# Altium PCB ssop28 - single.PcbDoc
Units mil, origin at the board's own origin, x right, y up, seen from the top; angles counter-clockwise.
Board outline 1487 x 879.22 mil, 2 copper layers (Top Layer, Bottom Layer); 3 components, 142 nets, 56 pads, 0 vias.
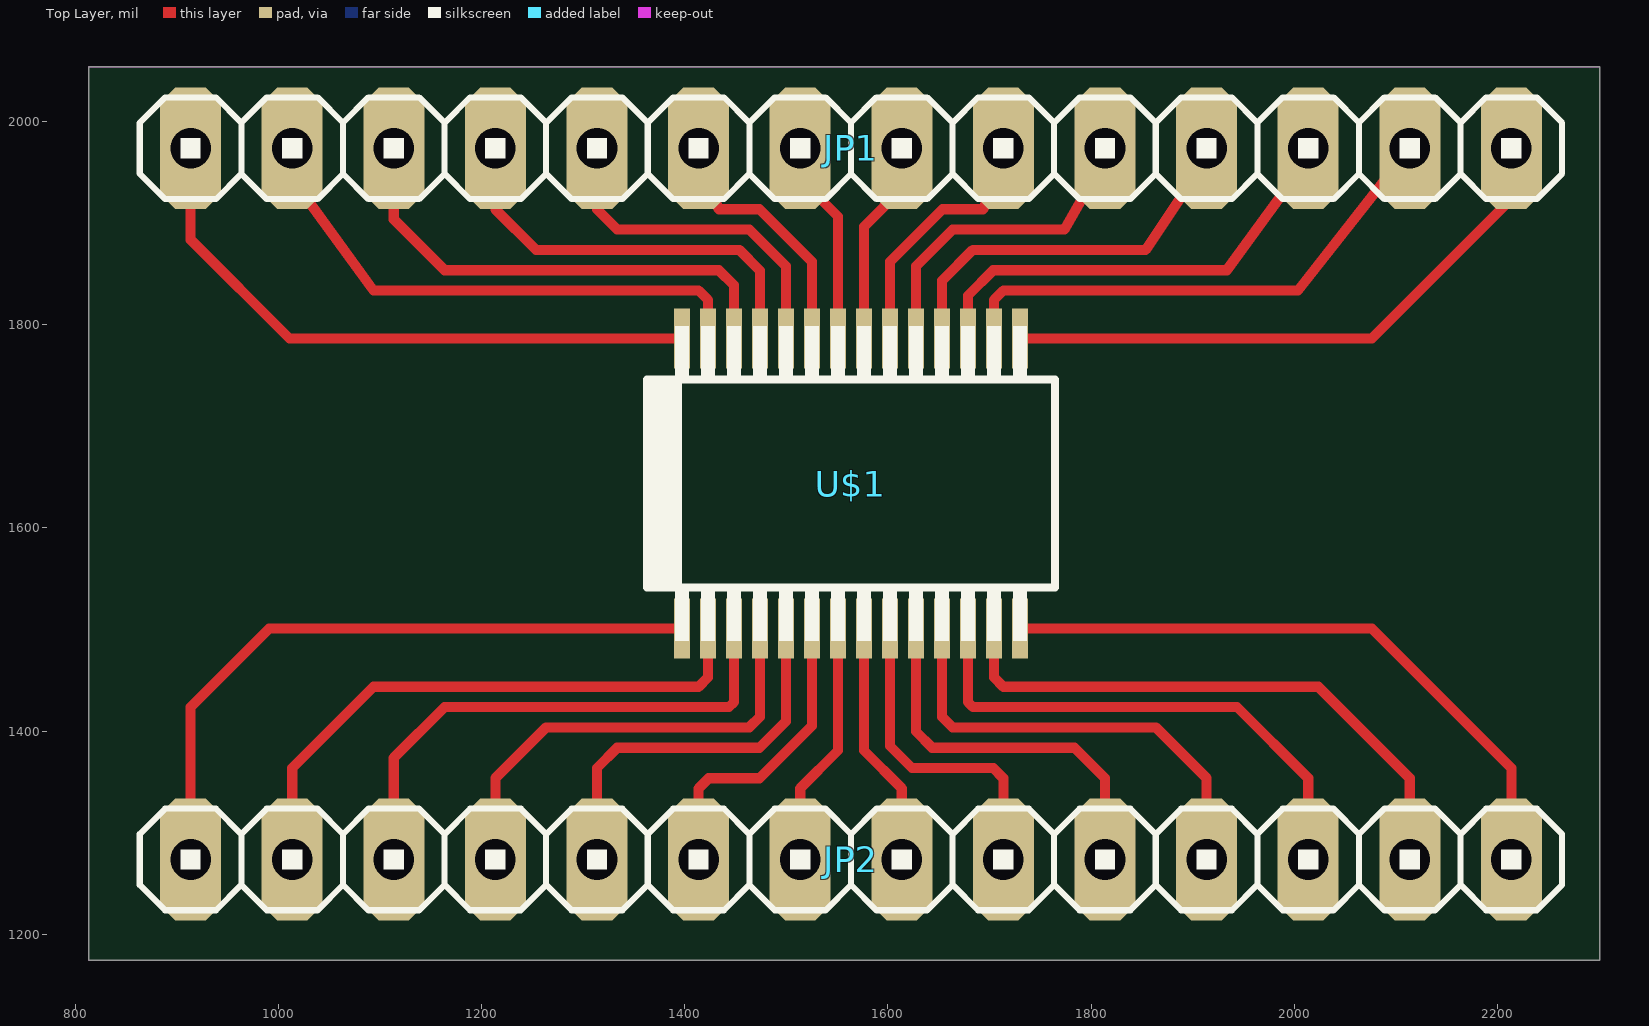
[diagram p0: Top Layer view]
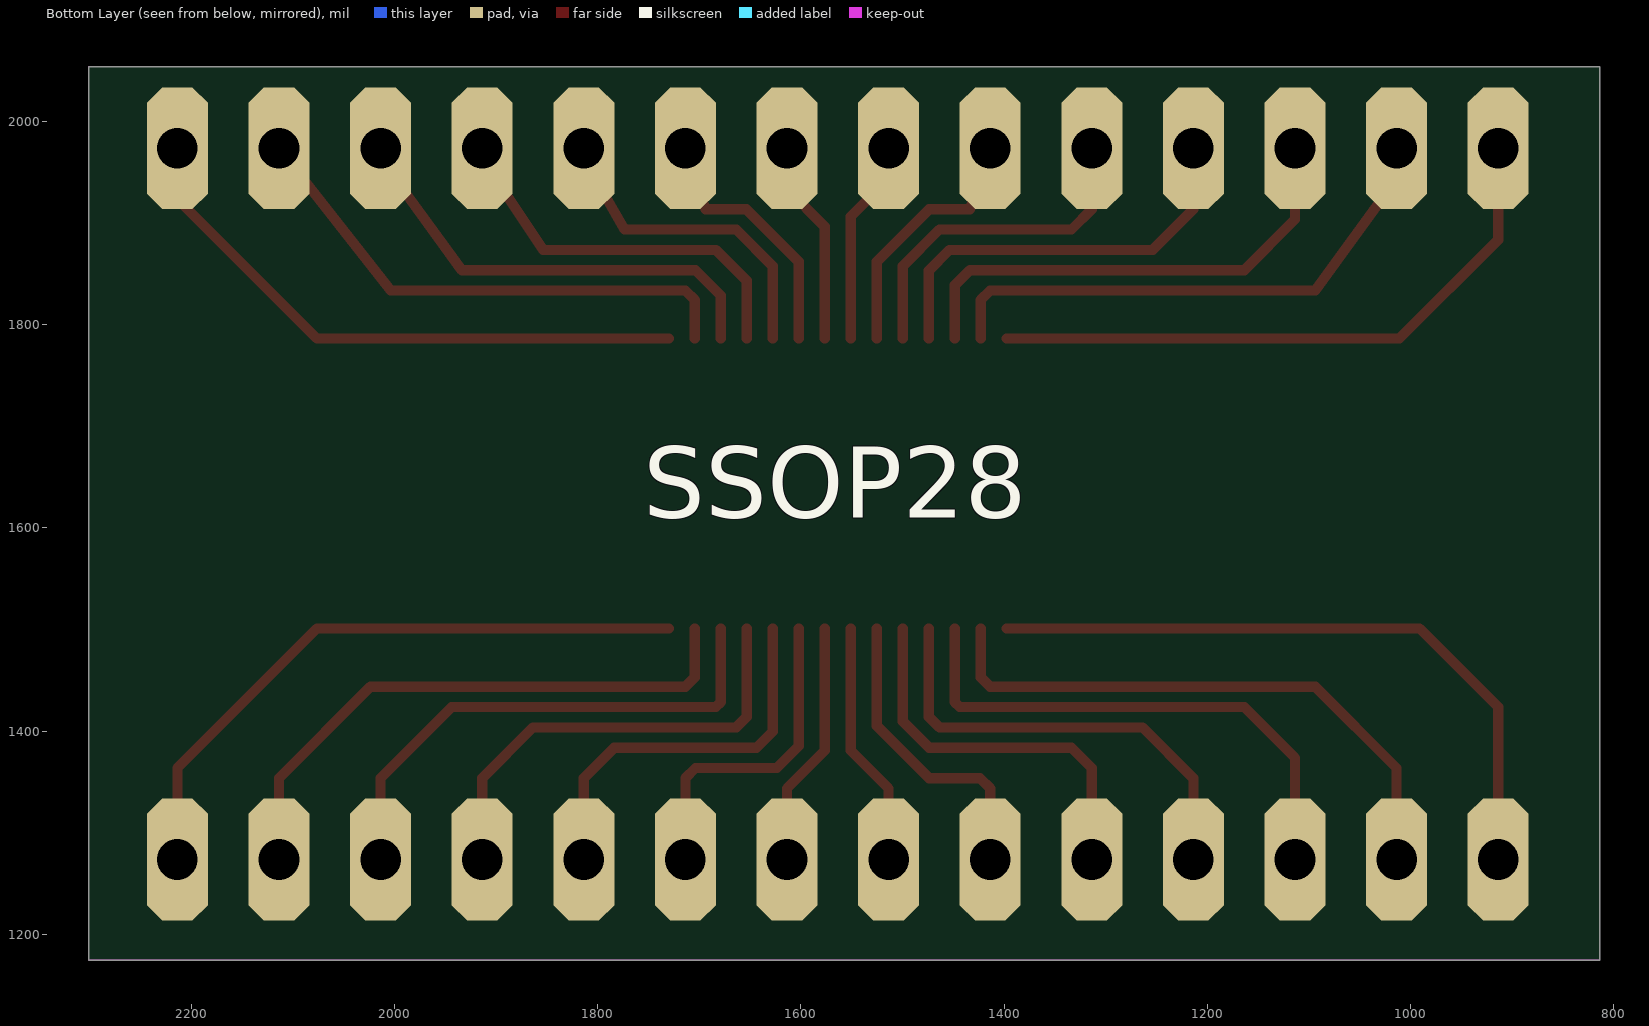
[diagram p1: Bottom Layer view, seen from below]

## Layer stack, top to bottom
Top Layer: signal copper 1.4
Dielectric: dielectric 12.6, FR-4, Dk 4.8
Bottom Layer: signal copper 1.4

## Board outline
813.67,1174.45 813.67,2053.67 2300.67,2053.67 2300.67,1174.45

## Design rules (kind name [scope] priority, off if disabled: settings)
Clearance [All] p1: gap=10
PolygonConnect [All] p1: connectstyle=Relief reliefconductorwidth=10 reliefentries=4 polygonreliefangle="90 Angle"
RoutingVias [All] p1: holewidth=28 width=50 viastyle="Through Hole" minholewidth=28 minwidth=50 maxholewidth=28 maxwidth=50
SilkscreenOverComponentPads [All] p1: minsilkscreentomaskgap=10
SolderMaskExpansion [All] p1: expansion=4
Width [All] p1: maxlimit=10 minlimit=10 preferedwidth=10
27 further rules are at their usual default settings.

## Components (designator, comment, footprint, x,y, rotation, side; value= is the part's Value field where it differs from the comment)
JP1 "Comment" 1X14 1563.67,1973.67 r180 top
JP2 "Comment" 1X14 1563.67,1273.67 r0 top
U$1 "PIC18F26K20-SSOP" SSOP28 1563.67,1643.67 r0 top

## Footprints (in the part's own frame and the unit in brackets; to place one, negate y for a bottom-side part, rotate by r counter-clockwise, add the part's x,y. Pads: shape width x height; smd on the part's side, far side on the other; paste and mask are expansions set on the pad)
1X14 [mil]
  oct 60x120 hole 40: 1(-650,0) 2(-550,0) 3(-450,0) 4(-350,0) 5(-250,0) 6(-150,0) 7(-50,0) 8(50,0) 9(150,0) 10(250,0) 11(350,0) 12(450,0) 13(550,0) 14(650,0)
  silkscreen extent -700,-50 700,50
SSOP28 [mm]
  rect 0.4x1.5 smd: 1(-4.225,-3.625) 2(-3.575,-3.625) 3(-2.925,-3.625) 4(-2.275,-3.625) 5(-1.625,-3.625) 6(-0.975,-3.625) 7(-0.325,-3.625) 8(0.325,-3.625) 9(0.975,-3.625) 10(1.625,-3.625) 11(2.275,-3.625) 12(2.925,-3.625) 13(3.575,-3.625) 14(4.225,-3.625) 15(4.225,3.625) 16(3.575,3.625) 17(2.925,3.625) 18(2.275,3.625) 19(1.625,3.625) 20(0.975,3.625) 21(0.325,3.625) 22(-0.325,3.625) 23(-0.975,3.625) 24(-1.625,3.625) 25(-2.275,3.625) 26(-2.925,3.625) 27(-3.575,3.625) 28(-4.225,3.625)
  silkscreen extent -5.2,-3.94 5.1,3.94

## Nets (pads, with @x,y where several pads share a name; then routed paths per layer and width w, separated by ;. In a path a pad name is that pad's centre, name@x,y a point inside that pad or via, vN(x,y) a via of type N, cw(c..) or ccw(c..) an arc to the next point about the centre after c; other vN are vias at no path point)
N$1: JP2.11 U$1.11 | length 452.3
  Top Layer w10: U$1.11 1653.23,1414.1 1663.67,1403.67 1863.67,1403.67 1913.67,1353.67 JP2.11
N$2: JP2.8 U$1.8 | length 242.7
  Top Layer w10: U$1.8 1576.46,1380.87 1613.67,1343.67 JP2.8
N$3: JP2.9 U$1.9 | length 320.4
  Top Layer w10: U$1.9 1602.05,1385.28 1623.67,1363.67 1703.67,1363.67 1713.67,1353.67 JP2.9
N$4: JP2.10 U$1.10 | length 386.3
  Top Layer w10: U$1.10 1627.64,1399.69 1643.67,1383.67 1783.67,1383.67 1813.67,1353.67 JP2.10
N$5: JP1.7 U$1.21 | length 202.7
  Top Layer w10: U$1.21 1576.46,1896.46 1613.67,1933.67 JP1.7
N$6: JP1.8 U$1.22 | length 202.7
  Top Layer w10: JP1.8 1513.67,1943.67 1550.87,1906.46 U$1.22
N$7: JP1.9 U$1.23 | length 252.5
  Top Layer w10: JP1.9 1413.67,1963.67 1433.67,1913.67 1473.67,1913.67 1525.28,1862.05 U$1.23
N$8: JP1.10 U$1.24 | length 340.5
  Top Layer w10: JP1.10 1313.67,1913.67 1333.67,1893.67 1463.67,1893.67 1499.69,1857.64 U$1.24
N$9: JP1.11 U$1.25 | length 412.3
  Top Layer w10: JP1.11 1213.67,1913.67 1253.67,1873.67 1453.67,1873.67 1474.1,1853.23 U$1.25
N$10: JP1.12 U$1.26 | length 484.1
  Top Layer w10: JP1.12 1113.67,1903.67 1163.67,1853.67 1433.67,1853.67 1448.51,1838.82 U$1.26
N$11: JP1.13 U$1.27 | length 537.1
  Top Layer w10: JP1.13 1013.67,1943.67 1093.67,1833.67 1413.67,1833.67 1422.92,1824.41 U$1.27
N$12: JP1.14 U$1.28 | length 614
  Top Layer w10: JP1.14 913.67,1883.67 1010.95,1786.38 U$1.28
N$13: JP2.2 U$1.2 | length 584.2
  Top Layer w10: JP2.2 1013.67,1363.67 1093.67,1443.67 1413.67,1443.67 1422.92,1452.92 U$1.2
N$14: JP2.3 U$1.3 | length 530
  Top Layer w10: JP2.3 1113.67,1373.67 1163.67,1423.67 1443.67,1423.67 1448.51,1428.51 U$1.3
N$15: JP2.4 U$1.4 | length 452.3
  Top Layer w10: JP2.4 1213.67,1353.67 1263.67,1403.67 1463.67,1403.67 1474.1,1414.1 U$1.4
N$16: JP2.5 U$1.5 | length 386.3
  Top Layer w10: JP2.5 1313.67,1363.67 1333.67,1383.67 1473.67,1383.67 1499.69,1409.69 U$1.5
N$17: JP2.6 U$1.6 | length 302.8
  Top Layer w10: JP2.6 1413.67,1343.67 1423.67,1353.67 1473.67,1353.67 1525.28,1405.28 U$1.6
N$18: JP2.7 U$1.7 | length 242.7
  Top Layer w10: JP2.7 1513.67,1343.67 1550.87,1380.87 U$1.7
N$19: JP2.12 U$1.12 | length 518.3
  Top Layer w10: U$1.12 1678.82,1428.51 1683.67,1423.67 1943.67,1423.67 2013.67,1353.67 JP2.12
N$20: JP2.13 U$1.13 | length 578.4
  Top Layer w10: U$1.13 1704.41,1452.92 1713.67,1443.67 2023.67,1443.67 2113.67,1353.67 JP2.13
N$21: JP2.14 U$1.14 | length 630.5
  Top Layer w10: U$1.14 2076.38,1500.95 2213.67,1363.67 JP2.14
N$22: JP1.1 U$1.15 | length 590.5
  Top Layer w10: U$1.15 2076.38,1786.38 2213.67,1923.67 JP1.1
N$23: JP1.2 U$1.16 | length 519.2
  Top Layer w10: U$1.16 1704.41,1824.41 1713.67,1833.67 2003.67,1833.67 JP1.2
N$24: JP1.3 U$1.17 | length 453.6
  Top Layer w10: U$1.17 1678.82,1828.82 1703.67,1853.67 1933.67,1853.67 2013.67,1963.67 JP1.3
N$25: JP2.1 U$1.1 | length 665.7
  Top Layer w10: JP2.1 913.67,1423.67 990.95,1500.95 U$1.1
N$26: JP1.4 U$1.18 | length 388.1
  Top Layer w10: U$1.18 1653.23,1843.23 1683.67,1873.67 1853.67,1873.67 1913.67,1963.67 JP1.4
N$27: JP1.5 U$1.19 | length 322.8
  Top Layer w10: U$1.19 1627.64,1857.64 1663.67,1893.67 1773.67,1893.67 1813.67,1963.67 JP1.5
N$28: JP1.6 U$1.20 | length 252.5
  Top Layer w10: U$1.20 1602.05,1862.05 1653.67,1913.67 1693.67,1913.67 1713.67,1963.67 JP1.6
N$29: 
N$30: 
N$31: 
N$32: 
N$33: 
N$34: 
N$35: 
N$36: 
N$37: 
N$38: 
N$39: 
N$40: 
N$41: 
N$42: 
N$43: 
N$44: 
S$1: 
S$2: 
S$3: 
S$4: 
S$5: 
S$6: 
S$7: 
S$8: 
S$9: 
S$10: 
S$11: 
S$12: 
S$13: 
S$14: 
S$15: 
S$16: 
S$17: 
S$18: 
S$19: 
S$20: 
S$21: 
S$22: 
S$23: 
S$24: 
S$25: 
S$26: 
S$27: 
S$28: 
S$29: 
S$30: 
S$31: 
S$32: 
S$33: 
S$34: 
S$35: 
S$36: 
S$37: 
S$38: 
S$39: 
S$40: 
S$41: 
S$42: 
S$43: 
S$44: 
S$45: 
S$46: 
S$47: 
S$48: 
S$49: 
S$50: 
S$51: 
S$52: 
S$53: 
S$54: 
S$55: 
S$56: 
S$57: 
S$58: 
S$59: 
S$60: 
S$61: 
S$62: 
S$63: 
S$64: 
S$65: 
S$66: 
S$67: 
S$68: 
S$69: 
S$70: 
S$71: 
S$72: 
S$73: 
S$74: 
S$75: 
S$76: 
S$77: 
S$78: 
S$79: 
S$80: 
S$81: 
S$82: 
S$83: 
S$84: 
S$85: 
S$86: 
S$87: 
S$88: 
S$89: 
S$90: 
S$91: 
S$92: 
S$93: 
S$94: 
S$95: 
S$96: 
S$97: 
S$98: 

## Keep-outs
Keep-Out Layer:
  the board outline again, w0.31

## Silkscreen, mask and mechanical layers (free items; w line width, h text height)
Bottom Overlay:
  text "SSOP28" at 1755,1610 h70